# EAGLE board board 6 (EAGLE 5.06)
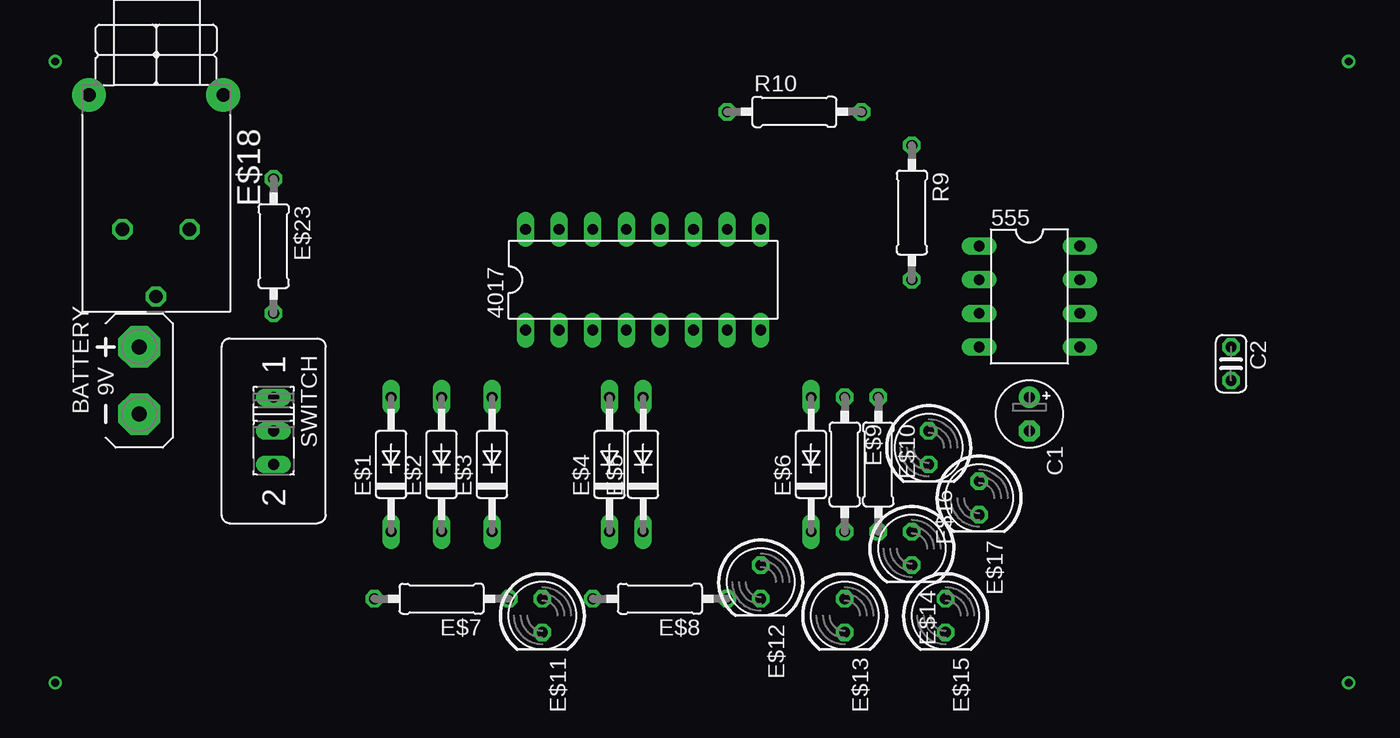
[diagram p0: board, top side]
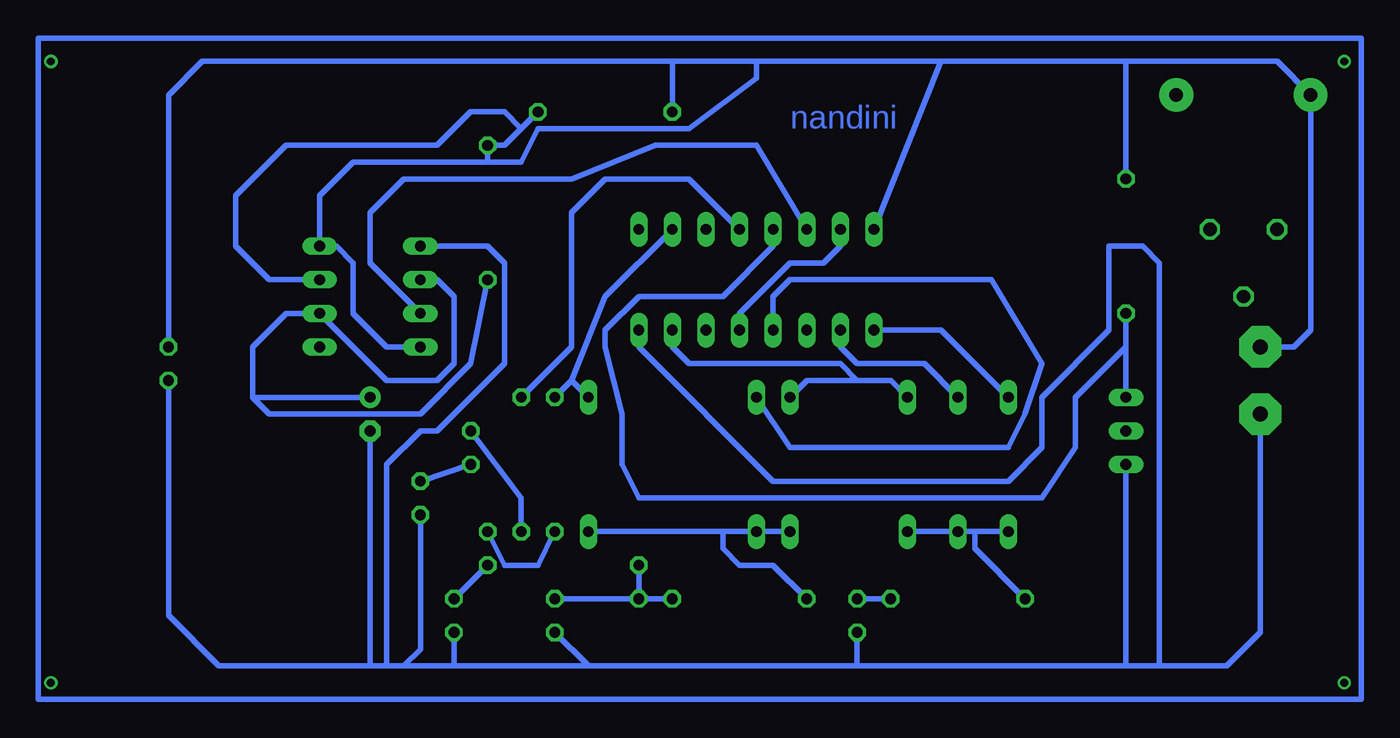
[diagram p1: board, bottom side, seen from below]

No outline drawn. Coordinates in mm, seen from the top.
Copper layers (1*16): Top 0.035mm / dielectric 1.5mm / Bottom 0.035mm
Design rules "default": minimum track width 10mil, minimum drill 24mil, track to track 8mil, track to pad 8mil, pad to pad 8mil, via to via 8mil, smd to smd 8mil, copper to edge 40mil, drill to drill 8mil, minimum pad ring 10mil, minimum via ring 8mil, stop-mask expansion 4mil, vias tented up to drill 0mil, thermal gap 10mil

## Footprints (pad centres in the part's own frame; a part is rotated, then mirrored left to right if it is on the bottom)
DIL08 = drill 0.813 long: 1 -3.81,-3.81; 2 -1.27,-3.81; 3 1.27,-3.81; 4 3.81,-3.81; 5 3.81,3.81; 6 1.27,3.81; 7 -1.27,3.81; 8 -3.81,3.81
DIL16 = drill 0.813 long: 1 -8.89,-3.81; 2 -6.35,-3.81; 3 -3.81,-3.81; 4 -1.27,-3.81; 5 1.27,-3.81; 6 3.81,-3.81; 7 6.35,-3.81; 8 8.89,-3.81; 9 8.89,3.81; 10 6.35,3.81; 11 3.81,3.81; 12 1.27,3.81; 13 -1.27,3.81; 14 -3.81,3.81; 15 -6.35,3.81; 16 -8.89,3.81
AB9V = drill 1.118 pad 3.15 octagon: + 0,2.54; - 0,-2.54
E2,5-5 = drill 0.813 pad 1.6 round: + -1.27,0 | drill 0.813 pad 1.6 octagon: - 1.27,0
C025-024X044 = drill 0.813 octagon: 1 -1.27,0; 2 1.27,0
C2992 = drill 0.813 long: A 5.08,0; C -5.08,0
0207/10 = drill 0.813 octagon: 1 -5.08,0; 2 5.08,0
LED5MM = drill 0.813 octagon: A -1.27,0; K 1.27,0
316-917 = drill 1.016 octagon: 1 10.16,2.54; 2 15.24,0; 3 10.16,-2.54 | drill 1.016 pad 2.54 round: B 0,-5.08; B1 0,5.08
M251 = drill 0.813 long: 1 -2.54,0; 2 0,0; 3 2.54,0

## Placement (x,y rotation side)
555  [DIL08]  74.93,30.48 270 top
4017  [DIL16]  45.72,31.75 0 top
BATTERY  [AB9V]  7.62,24.13 0 top
C1  [E2,5-5]  74.93,21.59 270 top
C2  [C025-024X044]  90.17,25.4 270 top
E$1  [C2992]  26.67,17.78 90 top
E$2  [C2992]  30.48,17.78 90 top
E$3  [C2992]  34.29,17.78 90 top
E$4  [C2992]  43.18,17.78 90 top
E$5  [C2992]  45.72,17.78 90 top
E$6  [C2992]  58.42,17.78 90 top
E$7  [0207/10]  30.48,7.62 180 top
E$8  [0207/10]  46.99,7.62 180 top
E$9  [0207/10]  60.96,17.78 270 top
E$10  [0207/10]  63.5,17.78 270 top
E$11  [LED5MM]  38.1,6.35 270 top
E$12  [LED5MM]  54.61,8.89 270 top
E$13  [LED5MM]  60.96,6.35 270 top
E$14  [LED5MM]  66.04,11.43 270 top
E$15  [LED5MM]  68.58,6.35 270 top
E$16  [LED5MM]  67.31,19.05 270 top
E$17  [LED5MM]  71.12,15.24 270 top
E$18  [316-917]  8.89,45.72 270 top
E$23  [0207/10]  17.78,34.29 270 top
R9  [0207/10]  66.04,36.83 270 top
R10  [0207/10]  57.15,44.45 0 top
SWITCH  [M251]  17.78,20.32 270 top

## Library data of the parts
555 4017 = ic-package
BATTERY = battery
C1 C2 E$7-E$10 E$23 R9 R10 = resistor
E$1-E$6 = diode
E$11-E$17 = led
E$18 SWITCH = switch

## Nets
S$2: 555.4 555.8 4017.16 BATTERY.+ C2.1 E$18.B E$23.1 R10.1
S$4: 4017.1 E$1.A
S$5: 4017.2 E$2.A
S$6: 4017.13
S$7: 4017.7 E$3.A E$4.A
S$8: E$4.C E$5.C E$6.C E$8.2
S$9: 555.7 R9.1 R10.2
S$11: E$1.C E$2.C E$3.C E$7.2
S$12: 4017.10 E$6.A E$9.1
S$13: E$7.1 E$11.A
S$14: 4017.4 E$5.A
S$15: E$9.2 E$14.A
S$16: E$14.K E$15.A
S$17: 4017.12 E$10.1
S$18: E$10.2 E$16.A
S$19: E$16.K E$17.A
S$20: E$8.1 E$12.A
S$21: 555.2 555.6 C1.+ R9.2
S$22: E$12.K E$13.A
S$23: 4017.5 4017.15
S$24: E$23.2 SWITCH.1
S$25: 555.3 4017.14
S$26: 555.1 4017.8 C1.- C2.2 E$11.K E$13.K E$15.K E$17.K SWITCH.3

## Tracks (layer width: path | path; a pad name or v marks a point on that pad's centre or on a via)
S$1
  Bottom 0.406: 0,0 100,0 100,50 0,50 0,0
S$2
  Bottom 0.406: BATTERY.+ 5.08,26.67 3.81,27.94 E$18.B 6.35,48.26 10.16,48.26 | 555.4 73.66,26.67 76.2,29.21 76.2,33.02 77.47,34.29 555.8 78.74,38.1 76.2,40.64 63.5,40.64 62.23,43.18 50.8,43.18 45.72,46.99 45.72,48.26 | C2.1 90.17,45.72 87.63,48.26 52.07,48.26 | 52.07,48.26 R10.1 | 45.72,48.26 52.07,48.26 | 31.75,48.26 45.72,48.26 | 31.75,48.26 4017.16 | 17.78,48.26 31.75,48.26 | 17.78,48.26 E$23.1 | 10.16,48.26 17.78,48.26 | 10.16,48.26 8.89,48.26
S$3  (via drill 0.6)
  other vias: 1.27,48.26
S$4
  Bottom 0.406: 4017.1 31.75,27.94 E$1.A
S$5
  Bottom 0.406: 4017.2 39.37,26.67 38.1,25.4 33.02,25.4 E$2.A
S$6
  Bottom 0.406: 17.78,26.67 21.59,22.86 21.59,19.05 24.13,15.24 54.61,15.24 55.88,17.78 55.88,21.59 57.15,26.67 57.15,27.94 54.61,30.48 48.26,30.48 44.45,34.29 4017.13
S$7
  Bottom 0.406: 4017.7 52.07,26.67 50.8,25.4 39.37,25.4 38.1,24.13 | 38.1,24.13 35.56,24.13 E$3.A | 38.1,24.13 41.91,24.13 E$4.A
S$8
  Bottom 0.406: E$4.C E$5.C 48.26,12.7 | 48.26,12.7 E$6.C | 48.26,12.7 48.26,11.43 46.99,10.16 44.45,10.16 E$8.2
S$9
  Bottom 0.406: 555.7 82.55,31.75 85.09,34.29 85.09,38.1 81.28,41.91 69.85,41.91 67.31,44.45 64.77,44.45 63.5,43.18 | 66.04,40.64 R9.1 64.77,41.91 63.5,43.18 | 63.5,43.18 R10.2
S$11
  Bottom 0.406: E$1.C 29.21,12.7 | 29.21,12.7 E$2.C E$3.C | 29.21,12.7 29.21,11.43 E$7.2
S$12
  Bottom 0.406: 4017.10 57.15,30.48 59.69,24.13 | 59.69,24.13 E$9.1 | 59.69,24.13 E$6.A
S$13
  Bottom 0.406: E$7.1 E$11.A
S$14
  Bottom 0.406: E$5.A 43.18,19.05 26.67,19.05 25.4,21.59 24.13,25.4 27.94,31.75 43.18,31.75 44.45,30.48 4017.4
S$15
  Bottom 0.406: E$9.2 62.23,10.16 64.77,10.16 E$14.A
S$16
  Bottom 0.406: E$14.K E$15.A
S$17
  Bottom 0.406: 4017.12 50.8,39.37 57.15,39.37 59.69,36.83 59.69,26.67 E$10.1
S$18
  Bottom 0.406: E$10.2 63.5,15.24 E$16.A
S$19
  Bottom 0.406: E$16.K E$17.A
S$20
  Bottom 0.406: E$8.1 54.61,7.62 E$12.A
S$21
  Bottom 0.406: 555.2 69.85,31.75 68.58,30.48 68.58,25.4 69.85,24.13 73.66,24.13 555.6 81.28,29.21 83.82,26.67 83.82,22.86 | 83.82,22.86 C1.+ | 83.82,22.86 82.55,21.59 71.12,21.59 67.31,25.4 R9.2
S$22
  Bottom 0.406: E$12.K E$13.A
S$23
  Bottom 0.406: 4017.5 46.99,29.21 43.18,33.02 40.64,33.02 39.37,34.29 4017.15
S$24
  Bottom 0.406: SWITCH.1 E$23.2
S$25
  Bottom 0.406: 555.3 74.93,33.02 74.93,36.83 72.39,39.37 59.69,39.37 53.34,41.91 45.72,41.91 4017.14
S$26
  Bottom 0.406: 4017.8 54.61,26.67 44.45,16.51 26.67,16.51 24.13,19.05 24.13,22.86 19.05,27.94 19.05,34.29 16.51,34.29 15.24,33.02 15.24,2.54 | 555.1 66.04,34.29 64.77,33.02 64.77,25.4 69.85,20.32 71.12,20.32 73.66,17.78 73.66,2.54 | C2.2 90.17,6.35 86.36,2.54 74.93,2.54 | 74.93,2.54 C1.- | E$17.K 71.12,3.81 72.39,2.54 | 73.66,2.54 74.93,2.54 | 72.39,2.54 73.66,2.54 | 68.58,2.54 72.39,2.54 | 68.58,2.54 E$15.K | 58.42,2.54 68.58,2.54 | 58.42,2.54 E$13.K | 38.1,2.54 58.42,2.54 | 38.1,2.54 E$11.K | 7.62,20.32 7.62,5.08 10.16,2.54 15.24,2.54 | 15.24,2.54 17.78,2.54 | 17.78,2.54 38.1,2.54 | SWITCH.3 17.78,2.54
S$27  (via drill 0.6)
  other vias: 99.06,48.26
S$29  (via drill 0.6)
  other vias: 99.06,1.27
S$30  (via drill 0.6)
  other vias: 1.27,1.27

## Text on the board
Bottom: nandini